# Altium PCB RevA.PcbDoc (part 2 of 2)
Units mm, origin at the board's own origin, x right, y up, seen from the top; angles counter-clockwise.
Board outline 119.55 x 74.88 mm, 2 copper layers (Top Layer, Bottom Layer); 154 components, 82 nets, 576 pads, 146 vias.
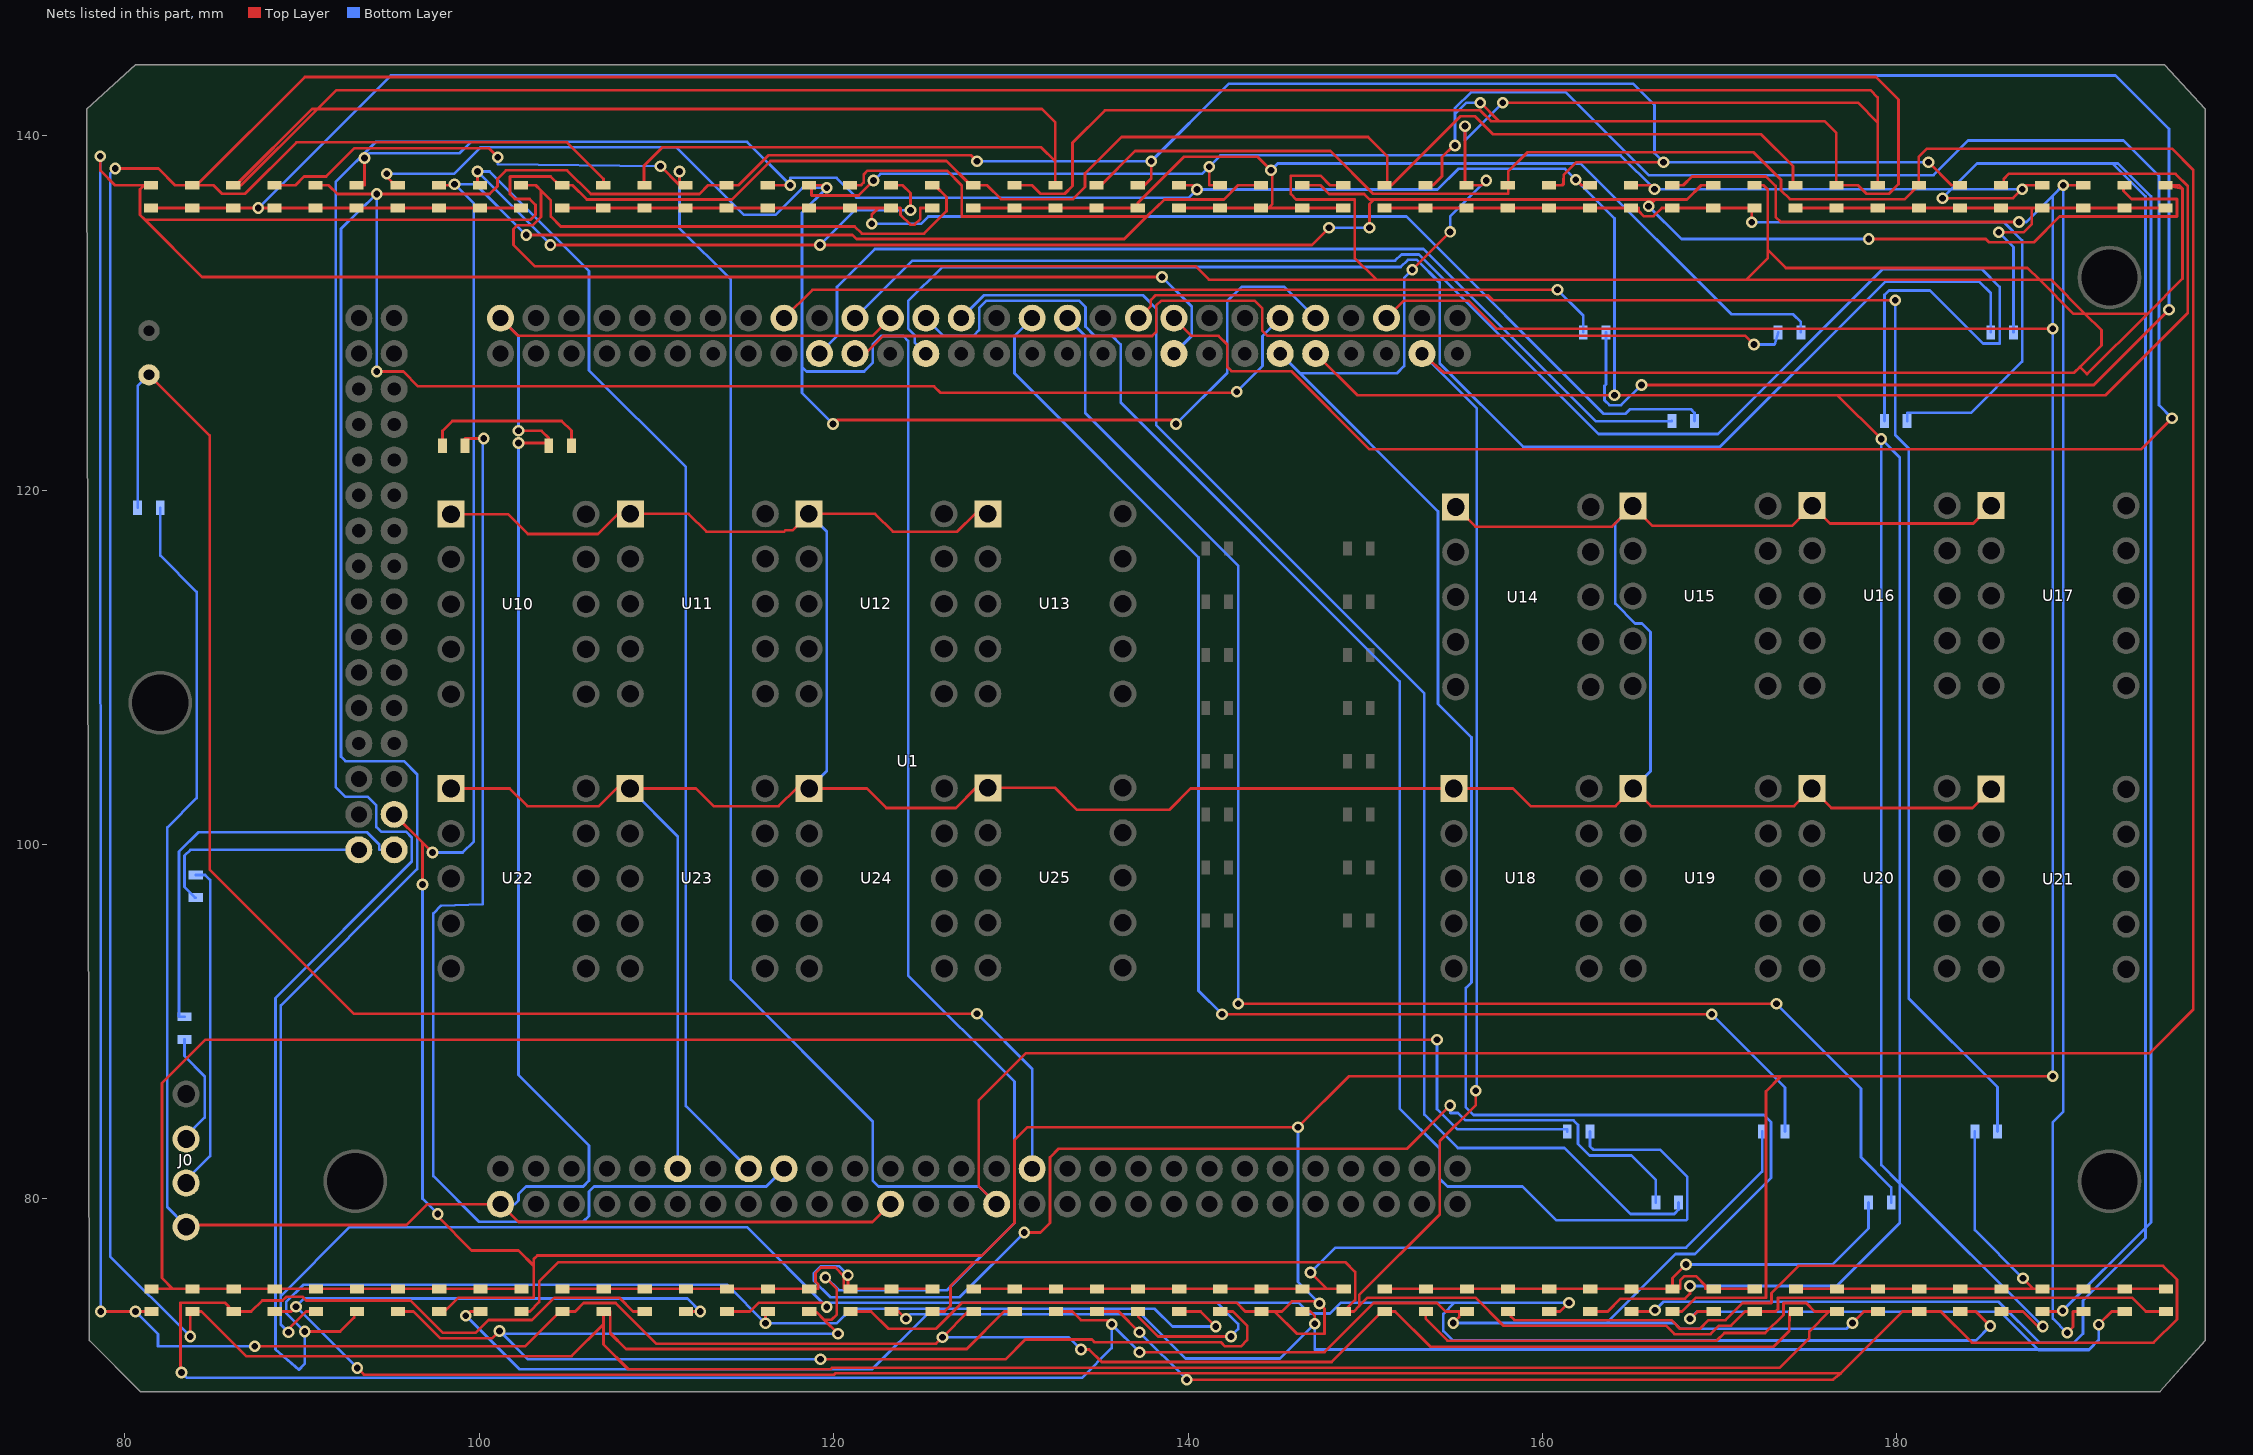
[diagram p2: the nets of this part, all layers, seen from the top]

## Via types
v1: diameter 0.66, hole 0.381, Top Layer to Bottom Layer, 146 vias

## Nets (pads, with @x,y where several pads share a name; then routed paths per layer and width w, separated by ;. In a path a pad name is that pad's centre, name@x,y a point inside that pad or via, vN(x,y) a via of type N, cw(c..) or ccw(c..) an arc to the next point about the centre after c; other vN are vias at no path point) (continued)
C_g/IO_VB6N1_171: U1.171 U10.1 U11.1 U12.1 U13.1 U14.1 U15.1 U16.1 U17.1 U18.1 U19.1 U20.1 U21.1 U22.1 U23.1 U24.1 U25.1 | length 215.6
  Top Layer w0.152: U22.1@98.4,103.16 101.716,103.16 102.718,102.159 106.746,102.159 107.747,103.16 U23.1@108.5,103.16 112.223,103.16 113.224,102.159 116.891,102.159 117.892,103.16 U24.1@118.62,103.16 121.869,103.16 122.972,102.057 126.898,102.057 128.041,103.2 U25.1@128.7,103.2 132.486,103.2 133.732,101.955 138.937,101.955 140.142,103.16 U18.1@155,103.16 158.333,103.16 159.334,102.159 164.119,102.159 U19.1@165.12,103.16 166.121,102.159 174.199,102.159 U20.1@175.2,103.16 176.303,102.057 184.257,102.057 U21.1@185.32,103.12 ; U10.1@98.4,118.64 101.629,118.64 102.743,117.526 106.689,117.526 107.823,118.66 U11.1@108.52,118.66 111.811,118.66 112.818,117.653 117.197,117.653 117.273,117.728 117.668,117.728 U12.1@118.6,118.66 122.331,118.66 123.338,117.653 126.975,117.653 127.982,118.66 U13.1@128.7,118.66 ; U14.1@155.1,119.04 156.208,117.932 163.932,117.932 U15.1@165.1,119.1 166.217,117.983 174.083,117.983 U16.1@175.22,119.12 176.23,118.11 184.31,118.11 U17.1@185.32,119.12
  Bottom Layer w0.152: U23.1@108.5,103.16 111.2,100.46 U1.171@111.2,81.7 ; U12.1@118.6,118.66 119.609,117.651 119.609,104.149 U24.1@118.62,103.16 ; U15.1@165.1,119.1 164.109,118.109 164.109,113.589 165.227,112.471 165.608,112.471 166.09,111.989 166.09,104.13 U19.1@165.12,103.16
D0: D10.1 D11.1 D12.1 D13.1 D14.1 D15.1 D16.1 D17.1 D18.1 D19.1 R30.2 | length 181.3
  Top Layer w0.152: D10.1@81.48,135.92 D11.1@83.8,135.92 D12.1@86.12,135.92 v1(87.528,135.92) D13.1@88.44,135.92 D14.1@90.76,135.92 D15.1@93.08,135.92 D16.1@95.4,135.92 D17.1@97.72,135.92 D18.1@100.04,135.92 D19.1@102.36,135.92 ; v1(165.583,125.933) 191.11,125.933 v1(195.351,130.175)
  Bottom Layer w0.152: v1(87.528,135.92) 95.008,143.4 192.337,143.4 195.351,140.386 v1(195.351,130.175) ; R30.2@163.58,128.9 163.58,125.959 163.5,125.878 163.5,125.07 163.779,124.79 164.44,124.79 v1(165.583,125.933)
D0/IO_VB2N0_37: R30.1 U1.22 | length 47.3
  Top Layer w0.152: U1.22@117.2,129.7 118.799,131.299 v1(160.846,131.299)
  Bottom Layer w0.152: v1(160.846,131.299) 162.3,129.845 R30.1@162.3,128.9
D1: D20.1 D21.1 D22.1 D23.1 D24.1 D25.1 D26.1 D27.1 D28.1 D29.1 R31.2 | length 75.2
  Top Layer w0.152: D20.1@104.68,135.92 D21.1@107,135.92 D22.1@109.32,135.92 D23.1@111.64,135.92 D24.1@113.96,135.92 D25.1@116.28,135.92 D26.1@118.6,135.92 D27.1@120.92,135.92 122.53,135.92 ; v1(122.149,135.026) 122.149,135.539 122.53,135.92 ; D29.1@125.56,135.92 124.891,135.92 124.891,135.306 124.562,134.976 124.333,134.976 123.775,135.534 123.775,135.92 D28.1@123.24,135.92 122.53,135.92
  Bottom Layer w0.152: v1(122.149,135.026) 124.933,135.026 125.339,135.433 152.324,135.433 163.449,124.308 164.694,124.308 164.948,124.562 168.377,124.562 168.58,124.358 R31.2@168.58,123.9
D1/IO_VB2N0_38: R31.1 U1.37 | length 56.2
  Bottom Layer w0.152: U1.37@119.2,127.7 120.193,128.693 120.193,131.47 122.325,133.603 153.29,133.603 163.017,123.876 167.3,123.876 R31.1@167.3,123.9
D1_OUT: D1.2 R50.1 | length 9.4
  Top Layer w0.152: D1.2@97.92,122.5 97.92,123.342 98.479,123.901 104.648,123.901 105.2,123.349 R50.1@105.2,122.5
D2: D30.1 D31.1 D32.1 D33.1 D34.1 D35.1 D36.1 D37.1 D38.1 D39.1 R32.2 | length 64.4
  Top Layer w0.152: D30.1@127.88,135.92 D31.1@130.2,135.92 D32.1@132.52,135.92 D33.1@134.84,135.92 D34.1@137.16,135.92 137.16,136.195 139.776,138.81 143.917,138.81 v1(144.678,138.049) 144.755,137.973 144.755,136.144 144.531,135.92 ; D35.1@139.48,135.92 D36.1@141.8,135.92 D37.1@144.12,135.92 144.531,135.92 ; D39.1@148.76,135.92 D38.1@146.44,135.92 144.531,135.92
  Bottom Layer w0.152: v1(144.678,138.049) 145.059,138.429 162.154,138.429 170.663,129.921 174.142,129.921 174.58,129.483 R32.2@174.58,128.9
D2/IO_VB2N0_41: R32.1 U1.39 | length 56.5
  Top Layer w0.152: U1.39@121.2,127.7 121.8,127.7 122.79,128.69 137.973,128.69 138.201,128.919 138.201,130.404 138.488,130.69 143.751,130.69 144.19,130.251 144.19,128.987 144.475,128.702 171.45,128.702 v1(171.933,128.219)
  Bottom Layer w0.152: v1(171.933,128.219) 173.097,128.219 R32.1@173.3,128.9
D3: D40.1 D41.1 D42.1 D43.1 D44.1 D45.1 D46.1 D47.1 D48.1 D49.1 R33.2 | length 52.8
  Top Layer w0.152: D40.1@151.08,135.92 D41.1@153.4,135.92 D42.1@155.72,135.92 D43.1@158.04,135.92 D44.1@160.36,135.92 D45.1@162.68,135.92 D46.1@165,135.92 165.431,135.92 165.431,135.738 165.71,135.459 166.273,135.459 166.734,135.92 D47.1@167.32,135.92 D48.1@169.64,135.92 D49.1@171.806,135.92 ; v1(171.806,135.112) D49.1@171.806,135.92 ; D49.1@171.96,135.92 D49.1@171.806,135.92
  Bottom Layer w0.152: v1(171.806,135.112) 186.046,135.112 187.071,134.087 187.071,127.254 184.175,124.358 180.58,124.358 R33.2@180.58,123.9
D3/IO_VB2N0_43: R33.1 U1.41 | length 92.7
  Bottom Layer w0.152: U1.41@121.2,129.7 124.444,132.944 151.689,132.944 152.043,133.298 153.034,133.298 163.168,123.165 169.901,123.165 179.197,132.461 184.81,132.461 185.801,131.47 185.801,128.27 184.861,128.27 181.864,131.267 179.553,131.267 179.3,131.014 R33.1@179.3,123.9
D4: D50.1 D51.1 D52.1 D53.1 D54.1 D55.1 D56.1 D57.1 D58.1 D59.1 R34.2 | length 29.8
  Top Layer w0.152: D50.1@174.28,135.92 D51.1@176.6,135.92 D52.1@178.92,135.92 D53.1@181.24,135.92 182.054,135.92 182.058,135.916 183.129,135.916 183.133,135.92 D54.1@183.56,135.92 D55.1@185.88,135.92 187.613,135.92 ; v1(185.75,134.544) 187.147,134.544 187.613,135.009 187.613,135.92 ; D59.1@195.16,135.92 D58.1@192.84,135.92 D57.1@190.52,135.92 D56.1@188.2,135.92 187.613,135.92
  Bottom Layer w0.152: v1(185.75,134.544) 186.58,133.714 R34.2@186.58,128.9
D4/IO_VB2N1_44: R34.1 U1.43 | length 78.8
  Bottom Layer w0.152: U1.43@125.2,127.7 124.573,128.327 124.573,128.742 124.206,129.109 124.206,130.658 126.136,132.587 151.994,132.587 152.4,132.994 152.908,132.994 154.203,131.698 154.203,127.142 158.917,122.428 170.003,122.428 179.347,131.772 184.636,131.772 185.3,131.108 R34.1@185.3,128.9
D5: D60.1 D61.1 D62.1 D63.1 D64.1 D65.1 D66.1 D67.1 D68.1 D69.1 R40.2 | length 117.6
  Top Layer w0.152: D60.1@81.5,74.92 82.702,74.92 ; D69.1@102.38,74.92 D68.1@100.06,74.92 D67.1@97.74,74.92 D66.1@95.42,74.92 D65.1@93.1,74.92 D64.1@90.78,74.92 D63.1@88.46,74.92 D62.1@86.14,74.92 D61.1@83.82,74.92 82.702,74.92 ; v1(154.051,88.976) 84.531,88.976 82.093,86.538 82.093,75.53 82.702,74.92
  Bottom Layer w0.152: v1(154.051,88.976) 154.051,85.065 155.194,83.922 161.4,83.922 R40.2@161.4,83.8
D5/IO_VB2N1_45: R40.1 U1.44 | length 93.6
  Bottom Layer w0.152: U1.44@125.2,129.7 126.198,128.702 127.88,128.702 128.21,129.032 128.21,130.274 128.626,130.69 133.851,130.69 134.21,130.331 134.21,129.222 134.722,128.71 135.704,128.71 136.195,128.219 136.195,124.956 151.943,109.208 151.943,85.099 154.203,82.838 154.203,81.128 154.635,80.696 158.877,80.696 160.782,78.791 168.097,78.791 168.173,78.867 168.173,81.229 166.625,82.778 162.865,82.778 162.68,82.963 R40.1@162.68,83.8
D6: D70.1 D71.1 D72.1 D73.1 D74.1 D75.1 D76.1 D77.1 D78.1 D79.1 R41.2 | length 85
  Top Layer w0.152: D70.1@104.7,74.92 D71.1@107.02,74.92 D72.1@109.34,74.92 D73.1@111.66,74.92 D74.1@113.98,74.92 D75.1@116.3,74.92 D76.1@118.62,74.92 119.134,74.92 119.134,75.167 118.974,75.326 118.974,75.819 119.278,76.123 120.091,76.123 120.563,75.652 120.563,74.92 D77.1@120.802,74.92 ; v1(120.802,75.692) D77.1@120.802,74.92 ; D79.1@125.58,74.92 D78.1@123.26,74.92 D77.1@120.94,74.92 D77.1@120.802,74.92 ; v1(130.759,78.105) 131.674,78.105 132.207,78.638 132.207,82.347 132.69,82.829 152.349,82.829 v1(154.788,85.268)
  Bottom Layer w0.152: v1(120.802,75.692) 120.294,76.2 119.278,76.2 118.872,75.794 118.872,75.387 119.812,74.447 127.102,74.447 v1(130.759,78.105) ; v1(154.788,85.268) 154.788,84.861 154.806,84.843 155.236,84.843 155.651,84.428 161.747,84.428 162.001,84.174 162.001,83.109 162.662,82.448 165.028,82.448 166.4,81.077 R41.2@166.4,79.8
D6/IO_VB2N2_49: R41.1 U1.46 | length 80.8
  Bottom Layer w0.152: U1.46@127.2,129.7 128.495,130.995 137.458,130.995 138.201,130.251 138.201,123.66 153.33,108.532 153.33,84.76 155.222,82.867 161.241,82.867 164.962,79.146 167.437,79.146 167.68,79.39 R41.1@167.68,79.8
D7: D80.1 D81.1 D82.1 D83.1 D84.1 D85.1 D86.1 D87.1 D88.1 D89.1 R42.2 | length 52.3
  Top Layer w0.152: D80.1@127.9,74.92 D81.1@130.22,74.92 D82.1@132.54,74.92 D83.1@134.86,74.92 D84.1@137.18,74.92 D85.1@139.5,74.92 D86.1@141.82,74.92 D87.1@144.14,74.92 D88.1@146.46,74.92 147.838,74.92 ; v1(146.914,75.844) 147.838,74.92 ; D89.1@148.78,74.92 147.838,74.92
  Bottom Layer w0.152: v1(146.914,75.844) 148.317,77.248 168.104,77.248 172.4,81.544 R42.2@172.4,83.8
D7/IO_VB2N3_55: R42.1 U1.52 | length 80.5
  Top Layer w0.152: v1(141.91,90.424) v1(169.545,90.424)
  Bottom Layer w0.152: U1.52@131.2,129.7 130.2,128.7 130.2,126.594 140.589,116.205 140.589,91.745 v1(141.91,90.424) ; v1(169.545,90.424) 173.68,86.289 R42.1@173.68,83.8
D8: D90.1 D91.1 D92.1 D93.1 D94.1 D95.1 D96.1 D97.1 D98.1 D99.1 R43.2 | length 36.2
  Top Layer w0.152: D90.1@151.1,74.92 D91.1@153.42,74.92 D92.1@155.74,74.92 D93.1@158.06,74.92 D94.1@160.38,74.92 D95.1@162.7,74.92 D96.1@165.02,74.92 D97.1@167.335,74.92 ; v1(168.097,76.302) 167.335,75.54 D97.1@167.335,74.92 ; D99.1@171.98,74.92 D98.1@169.66,74.92 169.198,74.92 169.198,75.098 168.656,75.641 168.021,75.641 167.768,75.387 167.768,74.92 D97.1@167.34,74.92 D97.1@167.335,74.92
  Bottom Layer w0.152: v1(168.097,76.302) 176.368,76.302 178.4,78.334 R43.2@178.4,79.8
D8/IO_VB2N3_57: R43.1 U1.56 | length 86.9
  Top Layer w0.152: v1(142.824,91.008) v1(173.203,91.008)
  Bottom Layer w0.152: U1.56@133.2,129.7 134.198,128.702 134.198,124.358 142.824,115.732 v1(142.824,91.008) ; v1(173.203,91.008) 177.978,86.233 177.978,82.347 179.68,80.645 R43.1@179.68,79.8
D9: D100.1 D101.1 D102.1 D103.1 D104.1 D105.1 D106.1 D107.1 D108.1 D109.1 R44.2 | length 31.1
  Top Layer w0.152: D100.1@174.3,74.92 D101.1@176.62,74.92 D102.1@178.94,74.92 D103.1@181.26,74.92 D104.1@183.58,74.92 D105.1@185.9,74.92 187.716,74.92 ; v1(187.122,75.514) 187.716,74.92 ; D109.1@195.18,74.92 D108.1@192.86,74.92 D107.1@190.54,74.92 D106.1@188.22,74.92 187.716,74.92
  Bottom Layer w0.152: R44.2@184.4,83.8 184.4,78.236 v1(187.122,75.514)
D9/IO_VB3N3_68: R44.1 U1.65 | length 92.9
  Top Layer w0.152: U1.65@137.2,129.7 137.896,130.396 137.896,130.731 138.159,130.995 156.937,130.995 157.223,130.708 v1(179.908,130.708)
  Bottom Layer w0.152: v1(179.908,130.708) 179.908,123.114 180.67,122.352 180.67,91.319 185.68,86.309 R44.1@185.68,83.8
G0/IO_VB3N2_69: D10.2 D20.2 D30.2 D40.2 D50.2 D60.2 D70.2 D80.2 D90.2 D100.2 U1.68 | length 350.1
  Top Layer w0.152: v1(78.613,138.836) 78.613,138.038 79.451,137.2 81.077,137.2 ; v1(78.638,73.64) v1(80.6,73.64) D60.2@81.5,73.64 ; D10.2@81.48,137.2 81.077,137.2 ; v1(87.325,71.679) 102.585,71.679 104.546,73.64 D70.2@104.7,73.64 105.414,73.64 105.893,74.118 107.696,74.118 109.982,71.832 125.781,71.832 v1(126.136,72.187) 127.59,73.64 D80.2@127.9,73.64 ; v1(133.96,71.501) 134.417,71.501 135.128,70.79 148.103,70.79 150.952,73.64 D90.2@151.1,73.64 151.689,73.64 153.674,71.655 173.039,71.655 173.927,72.542 173.945,73.64 D100.2@174.3,73.64 ; v1(138.532,132.029) 84.353,132.029 81.129,135.254 ; D40.2@151.08,137.2 D40.2@151.232,137.2 ; D50.2@174.28,137.2 174.142,137.2 174.142,138.278 172.339,140.081 157.199,140.081 156.184,141.096 155.382,141.096 151.486,137.2 D40.2@151.232,137.2 ; 81.077,137.2 80.848,136.971 80.848,135.534 81.129,135.254 ; 81.129,135.254 102.894,135.254 103.175,135.534 103.175,136.093 102.845,136.423 102.006,136.423 101.732,136.698 101.732,137.693 104.028,137.693 104.521,137.2 D20.2@104.68,137.2 105.269,137.2 106.07,136.398 114.249,136.398 116.422,138.571 126.366,138.571 127.737,137.2 D30.2@127.88,137.2 128.656,137.2 129.438,136.417 133.502,136.417 134.188,137.103 134.188,137.871 136.246,139.929 150.165,139.929 151.232,138.862 D40.2@151.232,137.2
  Bottom Layer w0.152: v1(78.613,138.836) 78.638,76.987 v1(78.638,73.64) ; v1(80.6,73.64) 81.87,72.37 81.87,71.679 v1(87.325,71.679) ; v1(126.136,72.187) 133.274,72.187 v1(133.96,71.501) ; v1(138.532,132.029) 140.208,130.353 140.208,128.708 U1.68@139.2,127.7
G1/IO_VB3N2_70: D11.2 D21.2 D31.2 D41.2 D51.2 D61.2 D71.2 D81.2 D91.2 D101.2 U1.69 | length 537.7
  Top Layer w0.152: v1(79.451,138.151) 81.89,138.151 82.84,137.2 D11.2@83.8,137.2 D11.2@84.049,137.2 ; v1(83.693,72.238) 83.693,73.64 D61.2@83.82,73.64 84.328,73.64 86.847,71.121 105.207,71.121 107.01,72.923 ; D21.2@107,137.2 107.01,137.2 107.01,137.566 104.954,139.622 89.686,139.622 86.785,136.722 85.492,136.722 85.013,137.2 D11.2@84.049,137.2 ; D31.2@130.2,137.2 131.195,137.2 131.674,136.722 133.039,136.722 133.477,137.16 133.477,139.598 135.305,141.426 156.488,141.426 157.097,140.818 157.531,140.818 ; D81.2@130.22,73.64 129.622,73.64 127.509,71.527 108.279,71.527 107.391,72.415 107.391,73.64 D71.2@107.02,73.64 107.01,73.64 107.01,72.923 ; U1.69@139.2,129.7 140.198,128.702 141.727,128.702 142.21,128.219 142.21,126.943 142.443,126.71 145.821,126.71 150.23,122.301 193.777,122.301 v1(195.529,124.054) ; D41.2@153.4,137.2 153.822,137.2 154.33,137.708 154.33,138.786 154.991,139.446 v1(155.067,139.446) ; D91.2@153.42,73.64 153.416,73.64 153.416,73.228 154.645,71.999 169.834,71.999 170.26,72.426 172.566,72.426 173.596,73.456 173.596,74.118 174.883,74.118 175.362,73.64 176.174,73.64 ; v1(156.489,141.859) 157.531,140.818 ; D101.2@176.62,73.64 176.174,73.64 ; D11.2@84.049,137.2 90.155,143.307 178.816,143.307 180.086,142.037 180.086,137.262 179.546,136.722 178.283,136.722 177.804,137.2 D51.2@176.6,137.2 176.581,137.2 176.581,140.157 175.92,140.818 157.531,140.818 ; 107.01,72.923 107.01,71.78 108.407,70.384 119.811,70.384 119.893,70.466 173.387,70.466 175.057,72.136 175.057,72.522 176.174,73.64
  Bottom Layer w0.152: v1(79.451,138.151) 79.172,137.871 79.172,76.759 v1(83.693,72.238) ; v1(155.067,139.446) 155.067,141.224 ; v1(156.489,141.859) 155.702,141.859 155.067,141.224 ; v1(195.529,124.054) 194.793,124.79 194.793,137.719 192.786,139.725 184.023,139.725 182.067,137.77 165.989,137.77 161.29,142.469 155.981,142.469 155.067,141.554 155.067,141.224
G2/IO_VB3N1_78: D12.2 D22.2 D32.2 D42.2 D52.2 D62.2 D72.2 D82.2 D92.2 D102.2 U1.76 | length 444.4
  Top Layer w0.152: v1(83.2,70.2) 83.135,70.265 83.135,74.142 85.637,74.143 D62.2@86.14,73.64 87.127,73.64 87.757,74.27 88.903,74.27 89.109,74.476 90.019,74.476 90.225,74.27 96.114,74.27 97.942,72.441 99.796,72.441 100.516,73.162 102.981,73.162 104.242,74.423 107.898,74.423 108.681,73.64 D72.2@109.34,73.64 ; D12.2@86.12,137.2 D12.2@86.258,137.2 ; D22.2@109.32,137.2 109.296,137.2 109.296,138.303 110.338,139.344 131.699,139.344 132.512,138.532 ; D32.2@132.52,137.2 132.512,137.2 132.512,138.532 ; D82.2@132.54,73.64 133.472,73.64 133.96,73.152 135.458,73.152 v1(135.687,72.923) ; v1(137.262,71.349) 147.7,71.349 150.47,74.118 154.051,74.118 154.529,73.64 155.296,73.64 ; v1(152.654,132.436) v1(154.788,134.569) ; v1(154.965,73) 155.296,73.33 155.296,73.64 ; v1(155.626,140.538) 155.626,137.2 D42.2@155.72,137.2 156.555,137.2 v1(156.82,137.465) ; D92.2@155.74,73.64 155.296,73.64 ; v1(157.759,141.859) 177.8,141.859 178.918,140.741 ; v1(177.495,73) 178.136,73.64 D102.2@178.94,73.64 ; D52.2@178.92,137.2 178.918,137.2 178.918,140.741 ; D12.2@86.258,137.2 86.563,137.2 90.867,141.503 ; D12.2@86.258,137.2 90.562,141.503 90.867,141.503 ; 90.867,141.503 131.75,141.503 132.512,140.741 132.512,138.532 ; 90.867,141.503 91.933,142.57 178.512,142.57 178.918,142.164 178.918,140.741
  Bottom Layer w0.152: v1(83.2,70.2) 83.499,69.901 134.011,69.901 135.687,71.577 v1(135.687,72.923) v1(137.262,71.349) ; U1.76@145.2,127.7 146.306,126.594 ; v1(152.654,132.436) 152.197,131.978 152.197,127 151.79,126.594 146.306,126.594 ; v1(154.788,134.569) 154.788,135.433 v1(156.82,137.465) ; v1(154.965,73) 163.608,73 ; v1(155.626,140.538) 155.626,139.725 v1(157.759,141.859) ; v1(177.495,73) 177.166,72.67 167.768,72.67 167.438,73 163.608,73 ; 146.306,126.594 154.102,118.798 154.102,107.933 155.99,106.045 155.99,92.211 155.677,91.897 155.677,85.166 156.108,84.734 172.491,84.734 172.898,84.328 172.898,81.178 168.612,76.893 167.501,76.893 163.608,73
G3/IO_VB3N1_80: D63.2 D73.2 D83.2 D93.2 D103.2 | length 222.3
  Top Layer w0.152: D63.2@88.46,73.64 89.388,73.64 v1(89.662,73.914) ; v1(93.116,70.46) 93.496,70.08 120.034,70.08 120.116,70.162 176.836,70.162 ; D73.2@111.66,73.64 v1(112.471,73.64) ; D83.2@134.86,73.64 136.088,73.64 v1(137.262,72.466) ; v1(139.929,69.799) 176.398,69.799 176.836,70.162 ; D93.2@158.06,73.64 158.217,73.64 158.217,73.355 158.42,73.152 167.284,73.152 167.766,72.67 168.885,72.67 169.367,73.152 170.331,73.152 171.298,74.118 172.921,74.118 172.921,74.686 174.452,76.217 195.029,76.217 195.809,75.438 195.809,73.203 194.488,71.882 184.232,71.882 182.474,73.64 D103.2@181.26,73.64 180.315,73.64 176.836,70.162
  Bottom Layer w0.152: v1(93.116,70.46) v1(89.662,73.914) 90.12,74.372 111.739,74.372 v1(112.471,73.64) ; v1(137.262,72.466) v1(139.929,69.799)
G3/IO_VB5N0_143: D13.2 D23.2 D33.2 D43.2 D53.2 U1.143 | length 288.7
  Top Layer w0.152: D13.2@88.44,137.2 89.626,137.2 90.119,137.693 91.362,137.693 92.961,139.293 100.534,139.293 v1(101.041,138.786) ; v1(110.226,138.277) D23.2@111.303,137.2 ; v1(111.303,137.973) D23.2@111.303,137.2 ; D23.2@111.64,137.2 D23.2@111.303,137.2 ; U1.143@129.2,79.7 128.194,80.706 128.194,85.573 130.835,88.214 194.259,88.214 196.723,90.678 196.723,138.074 195.529,139.268 181.712,139.268 181.229,138.786 D53.2@181.229,137.2 ; D33.2@134.84,137.2 135.079,137.2 137.016,139.137 148.029,139.137 150.444,136.722 158.064,136.722 D43.2@158.064,137.2 ; D43.2@158.04,137.2 D43.2@158.064,137.2 ; D53.2@181.24,137.2 D53.2@181.229,137.2 ; D43.2@158.064,137.2 158.064,137.973 159.156,139.064 171.908,139.064 173.462,137.511 173.462,136.912 173.956,136.417 180.446,136.417 D53.2@181.229,137.2
  Bottom Layer w0.152: v1(101.041,138.786) 101.041,138.379 v1(110.226,138.277) ; v1(111.303,137.973) 111.303,134.772 114.198,131.877 114.198,92.38 122.199,84.379 122.199,81.026 122.53,80.696 128.204,80.696 U1.143@129.2,79.7
G4/IO_VB3N1_81: D14.2 D24.2 D34.2 D44.2 D54.2 D64.2 D74.2 D84.2 D94.2 D104.2 U1.78 | length 377.9
  Top Layer w0.152: v1(89.23,72.466) 89.23,72.649 90.221,73.64 D64.2@90.78,73.64 ; D14.2@90.76,137.2 91.502,137.2 91.999,136.703 v1(94.209,136.703) 100.584,136.703 101.025,137.144 101.025,137.566 101.502,138.043 104.958,138.043 106.299,136.703 112.42,136.703 112.918,137.2 D24.2@113.96,137.2 114.621,137.2 116.308,138.887 127.762,138.887 v1(128.092,138.557) ; v1(94.209,126.69) 95.712,126.69 96.546,125.857 125.656,125.857 126.021,125.491 142.687,125.491 v1(142.748,125.552) ; D74.2@113.98,73.64 115.271,73.64 115.773,74.143 119.365,74.143 v1(119.609,73.899) ; D34.2@137.16,137.2 137.541,137.2 137.922,137.581 v1(137.922,138.557) ; D84.2@137.18,73.64 137.18,73.355 138.298,72.238 v1(142.418,72.238) ; D44.2@160.36,137.2 161.138,137.2 ; D94.2@160.38,73.64 160.991,73.64 v1(161.493,74.143) ; v1(166.827,138.506) 161.93,138.506 161.193,137.77 ; v1(181.788,138.506) 183.094,137.2 D54.2@183.56,137.2 ; D104.2@183.58,73.64 184.449,73.64 v1(185.268,72.822) ; 161.138,137.2 161.193,137.77 ; 161.138,137.2 161.193,137.255 161.193,137.77
  Bottom Layer w0.152: v1(89.23,72.466) 88.799,72.897 88.799,74.528 ; v1(94.209,126.69) v1(94.209,136.703) 92.202,134.747 92.202,104.953 92.456,104.699 95.758,104.699 96.495,103.962 96.495,98.603 88.799,90.908 88.799,74.528 ; v1(128.092,138.557) v1(137.922,138.557) 142.291,142.926 165.125,142.926 166.319,141.732 166.319,139.015 v1(166.827,138.506) v1(181.788,138.506) ; v1(142.418,72.238) 142.824,72.644 142.824,72.949 141.63,74.143 ; v1(142.748,125.552) 144.196,127 144.196,128.696 U1.78@145.2,129.7 ; v1(161.493,74.143) 155.042,74.143 ; v1(185.268,72.822) 184.455,72.009 154.94,72.009 154.407,72.542 154.407,73.508 155.042,74.143 ; 88.799,74.528 92.677,78.405 115.103,78.405 v1(119.609,73.899) ; v1(119.609,73.899) 119.852,74.143 ; v1(119.609,73.899) 119.609,74.143 119.852,74.143 ; 119.852,74.143 141.63,74.143 ; 141.63,74.143 146.232,74.143 146.847,73.528 148.002,73.528 148.617,74.143 155.042,74.143
G5/IO_VB3N1_82: D15.2 D25.2 D35.2 D45.2 D55.2 D65.2 D75.2 D85.2 D95.2 D105.2 U1.81 | length 460.6
  Top Layer w0.152: v1(90.145,72.517) 92.151,72.517 92.939,73.304 92.939,73.64 D65.2@93.1,73.64 ; D15.2@93.08,137.2 93.523,137.2 v1(93.523,138.735) ; v1(116.154,72.974) 116.154,73.64 D75.2@116.3,73.64 ; D25.2@116.28,137.2 v1(117.551,137.2) ; D35.2@139.48,137.2 140.259,137.2 v1(140.502,136.957) ; D85.2@139.5,73.64 140.711,73.64 v1(141.554,72.796) ; U1.81@147.2,127.7 149.551,125.349 ; v1(161.874,137.516) 161.889,137.516 162.204,137.2 D45.2@162.68,137.2 ; D95.2@162.7,73.64 163.683,73.64 164.414,74.371 168.049,74.371 168.326,74.647 v1(168.326,75.082) ; v1(179.121,122.885) 176.66,125.346 ; D55.2@185.88,137.2 186.03,137.2 186.03,137.566 186.309,137.846 195.717,137.846 196.417,137.146 196.417,130.005 191.759,125.346 176.66,125.346 ; D105.2@185.9,73.64 187.114,73.64 187.957,72.796 v1(188.239,72.796) ; 149.551,125.349 164.059,125.348 176.66,125.346 ; 149.551,125.349 v1(164.059,125.349) 176.657,125.349 176.66,125.346
  Bottom Layer w0.152: v1(93.523,138.735) 93.802,139.014 98.897,139.014 99.532,139.648 ; v1(141.554,72.796) 139.116,72.796 138.112,73.8 120.993,73.8 120.167,72.974 v1(116.154,72.974) 113.97,75.159 90.094,75.159 89.104,74.169 89.104,73.558 v1(90.145,72.517) 90.145,70.688 89.814,70.358 88.495,71.5 88.495,91.34 96.19,99.035 96.19,100.405 95.885,100.71 94.471,100.71 94.19,100.99 94.19,102.21 93.71,102.69 92.456,102.69 91.897,103.249 91.897,137.389 94.157,139.648 99.532,139.648 ; v1(164.059,125.349) 164.059,135.331 v1(161.874,137.516) 161.265,138.125 155.245,138.125 154.077,136.957 v1(140.502,136.957) 140.045,136.5 121.285,136.5 120.167,137.617 117.551,137.617 v1(117.551,137.2) 115.103,139.648 99.532,139.648 ; v1(168.326,75.082) 176.606,75.082 180.162,78.638 180.162,80.874 ; v1(188.239,72.796) 180.162,80.874 ; 180.162,80.874 180.162,121.844 v1(179.121,122.885) 179.121,81.915 180.162,80.874
G6/IO_VB3N1_83: D16.2 D26.2 D36.2 D46.2 D56.2 D66.2 D76.2 D86.2 D96.2 D106.2 U1.82 | length 489.7
  Top Layer w0.152: v1(94.782,137.846) 94.782,137.668 95.25,137.2 D16.2@95.4,137.2 ; D66.2@95.42,73.64 96.291,73.64 97.794,72.137 100.736,72.137 v1(101.142,72.543) v1@101.295,72.39 ; D26.2@118.6,137.2 D26.2@118.745,137.2 ; D76.2@118.62,73.64 118.62,73.584 119.05,73.584 119.456,73.178 ; v1(119.253,70.942) 129.692,70.942 130.81,72.06 134.569,72.06 134.722,71.907 141.859,71.907 142.087,71.679 142.977,71.679 143.332,72.035 143.332,72.847 142.539,73.64 D86.2@141.82,73.64 ; v1(119.532,75.565) 120.167,74.931 120.167,73.457 119.888,73.178 119.456,73.178 ; v1(119.609,137.058) 119.467,137.2 D26.2@118.745,137.2 ; v1(119.962,123.723) 120.19,123.951 139.091,123.951 v1(139.319,123.723) ; v1(120.244,72.39) 119.456,73.178 ; v1(122.25,137.465) 121.412,136.627 118.745,136.627 D26.2@118.745,137.2 ; v1(141.199,138.252) 141.199,137.2 D36.2@141.8,137.2 ; D46.2@165,137.2 166.101,137.2 v1(166.319,136.982) ; D96.2@165.02,73.64 166.274,73.64 v1(166.345,73.711) ; v1(182.575,136.474) 186.563,136.474 v1(187.071,136.982) 187.289,137.2 D56.2@188.2,137.2 ; D106.2@188.22,73.64 189.312,73.64 v1(189.357,73.685)
  Bottom Layer w0.152: v1(94.782,137.846) 98.565,137.846 100.063,139.344 111.126,139.344 114.935,135.534 116.713,135.534 118.237,137.058 v1(119.609,137.058) 118.21,135.66 118.21,126.951 ; v1(101.142,72.543) v1@101.295,72.39 ; v1(119.253,70.942) 102.743,70.942 v1@101.295,72.39 ; v1(119.532,75.565) 119.575,75.565 120.294,74.845 126.407,74.845 130.2,78.638 130.2,86.614 124.206,92.608 124.206,128.422 123.938,128.69 122.67,128.69 122.199,128.219 122.199,127.178 121.717,126.695 118.466,126.695 118.21,126.951 ; v1(119.962,123.723) 118.21,125.476 118.21,126.951 ; v1(120.244,72.39) v1@101.295,72.39 ; v1(122.25,137.465) 122.631,137.846 140.792,137.846 v1(141.199,138.252) 141.834,138.887 164.414,138.887 v1(166.319,136.982) 183.083,136.982 ; v1(139.319,123.723) 142.21,126.614 142.21,130.658 143.023,131.47 145.43,131.47 U1.82@147.2,129.7 ; v1(166.345,73.711) 166.827,74.193 185.725,74.193 188.036,71.882 189.992,71.882 190.5,72.39 190.5,74.27 194.031,77.8 194.031,78.359 ; v1(182.575,136.474) 183.083,136.982 ; v1(187.071,136.982) 183.083,136.982 ; v1(189.357,73.685) 194.031,78.359 ; 183.083,136.982 184.53,138.429 ; 184.53,138.429 192.177,138.429 ; 184.531,138.43 192.176,138.43 ; 192.177,138.429 194.031,136.576 194.031,78.359 ; 192.177,138.429 192.482,138.429 194.335,136.576 194.335,78.664 194.031,78.359
G7/IO_VB3N0_87: D17.2 D27.2 D37.2 D47.2 D57.2 D67.2 D77.2 D87.2 D97.2 D107.2 U1.86 | length 485.6
  Top Layer w0.152: U1.86@95.2,101.7 96.799,100.101 ; v1(96.799,97.739) 96.799,100.101 ; v1(97.357,99.543) 96.799,100.101 ; v1(97.663,79.146) 97.663,78.994 99.568,77.089 102.21,77.089 103.073,76.225 ; D17.2@97.72,137.2 98.541,137.2 v1(98.603,137.262) ; D67.2@97.74,73.64 98.044,73.64 98.826,74.422 103.073,74.422 103.073,76.225 ; v1(102.644,134.391) 121.058,134.391 121.286,134.164 136.399,134.164 137.668,135.433 ; D27.2@120.92,137.2 121.539,137.2 121.692,137.353 121.692,137.795 121.92,138.023 126.391,138.023 127.229,137.185 127.229,135.433 137.668,135.433 ; D77.2@120.94,73.64 122.118,73.64 123.088,72.67 125.781,72.67 127.254,74.143 142.723,74.143 143.225,73.64 D87.2@144.14,73.64 144.882,73.64 ; D37.2@144.12,137.2 142.824,137.2 142.023,136.399 138.659,136.399 ; U1.86@151.2,129.7 152.19,130.69 155.822,130.69 157.404,129.108 v1(188.798,129.108) ; D47.2@167.32,137.2 167.945,137.2 168.438,137.693 172.618,137.693 173.157,137.155 173.157,135.422 173.451,135.128 v1(186.893,135.128) ; D97.2@167.34,73.64 167.873,73.64 168.656,74.423 172.608,74.423 172.608,86.07 173.457,86.919 ; v1(188.798,86.919) 173.457,86.919 ; v1(189.382,137.2) D57.2@190.52,137.2 ; v1(189.611,72.441) 189.941,72.771 189.941,73.64 D107.2@190.54,73.64 ; 103.073,76.225 103.073,76.606 103.276,76.81 128.372,76.81 130.2,78.638 130.2,83.312 130.937,84.049 v1(146.202,84.049) 149.073,86.919 173.457,86.919 ; 137.668,135.433 137.693,135.433 138.659,136.399 ; 137.668,135.433 138.659,136.399 ; 144.882,73.64 145.288,73.64 145.867,74.219 147.295,74.219 v1(147.422,74.092) 147.701,73.812 147.701,72.39 146.132,72.39 144.882,73.64
  Bottom Layer w0.152: v1(96.799,97.739) 96.799,80.01 v1(97.663,79.146) ; v1(97.357,99.543) 99.06,99.543 99.695,100.177 99.695,136.17 v1(98.603,137.262) 99.774,137.262 v1(102.644,134.391) ; v1(146.202,84.049) 146.202,75.311 v1(147.422,74.092) ; v1(186.893,135.128) 187.31,135.128 188.798,136.616 ; v1(188.798,86.919) v1(188.798,129.108) 188.798,136.616 ; v1(189.611,72.441) 188.798,73.254 188.798,84.328 189.382,84.912 v1(189.382,137.2) 188.798,136.616
G8/IO_VB3N0_88: D68.2 D78.2 D88.2 D98.2 D108.2 | length 130.4
  Top Layer w0.152: v1(99.238,73.406) 99.472,73.64 D68.2@100.06,73.64 ; D78.2@123.26,73.64 123.667,73.64 v1(124.079,73.228) ; D88.2@146.46,73.64 146.914,73.64 147.142,73.411 v1(147.142,72.949) ; v1(168.326,73.228) 168.738,73.64 D98.2@169.66,73.64 ; v1(191.389,72.903) 192.126,73.64 D108.2@192.86,73.64
  Bottom Layer w0.152: v1(99.238,73.406) 102.26,70.384 122.175,70.384 125.287,73.496 ; v1(124.079,73.228) 124.347,73.496 125.287,73.496 ; v1(168.326,73.228) 168.732,73.635 185.826,73.635 187.96,71.501 ; v1(191.389,72.903) 191.389,72.034 190.856,71.501 ; 125.287,73.496 137.348,73.496 139.851,70.993 145.186,70.993 v1(147.142,72.949) 147.142,71.501 187.96,71.501 ; 187.96,71.501 188.011,71.45 190.805,71.45 190.856,71.501 ; 187.96,71.501 190.856,71.501
G8/IO_VB6N3_166: D18.2 D28.2 D38.2 D48.2 D58.2 U1.166 | length 186.5
  Top Layer w0.152: v1(99.898,137.973) 99.898,137.2 D18.2@100.04,137.2 ; v1(104.013,133.833) v1(119.228,133.833) 146.99,133.833 v1(147.955,134.798) ; D28.2@123.24,137.2 123.887,137.2 124.333,136.754 v1(124.333,135.788) ; D38.2@146.44,137.2 147.462,137.2 147.959,136.703 149.936,136.703 150.241,136.398 150.495,136.398 ; v1(150.241,134.798) 150.241,136.144 150.495,136.398 ; v1(165.989,136.017) 166.37,136.398 ; D48.2@169.64,137.2 168.961,137.2 168.159,136.398 166.37,136.398 ; v1(178.41,134.163) 185.015,134.163 185.193,133.986 187.74,133.986 189.187,135.433 195.809,135.433 195.809,136.423 193.243,136.423 192.786,136.881 192.786,137.2 D58.2@192.84,137.2 ; 150.495,136.398 166.37,136.398
  Bottom Layer w0.152: v1(104.013,133.833) 104.013,133.858 v1(99.898,137.973) 100.586,137.973 106.197,132.362 106.197,126.75 111.658,121.289 111.658,85.242 U1.166@115.2,81.7 ; v1(119.228,133.833) 121.183,135.788 v1(124.333,135.788) ; v1(147.955,134.798) v1(150.241,134.798) ; v1(165.989,136.017) 167.843,134.163 v1(178.41,134.163)
G9/IO_VB4N3_93: D19.2 D29.2 D39.2 D49.2 D59.2 D69.2 D79.2 D89.2 D99.2 D109.2 U1.87 | length 384.5
  Top Layer w0.152: D19.2@102.36,137.2 103.186,137.2 103.48,136.906 ; D69.2@102.38,73.64 102.85,73.64 103.378,74.168 103.378,75.336 104.469,76.428 127.939,76.428 ; D29.2@125.56,137.2 125.705,137.2 126.365,136.54 126.365,135.738 125.096,134.468 121.59,134.468 121.184,134.875 104.597,134.875 104.038,135.433 104.038,136.347 103.48,136.906 ; D79.2@125.58,73.64 126.263,73.64 126.594,73.97 126.594,75.082 127.939,76.428 ; D39.2@148.76,137.2 148.006,137.2 147.462,137.744 145.796,137.744 145.796,136.703 146.101,136.398 149.403,136.398 149.403,133.096 150.622,131.877 ; U1.87@153.2,127.7 154.433,126.619 189.992,126.619 190.322,126.949 ; v1(156.235,86.106) 156.235,85.293 154.203,83.261 154.203,79.121 149.657,74.574 149.657,73.945 ; D49.2@171.96,137.2 172.466,137.2 172.72,136.946 172.72,133.553 ; D109.2@195.18,73.64 194.051,73.64 193.268,74.423 173.292,74.423 173.292,73.773 173.159,73.64 D99.2@171.98,73.64 171.43,73.64 170.637,72.847 169.971,72.847 169.49,72.366 167.446,72.366 166.965,72.847 157.785,72.847 156.209,74.423 150.135,74.423 149.657,73.945 ; 103.48,136.906 103.48,135.409 103.021,134.95 102.159,134.95 101.931,134.722 101.931,133.833 103.125,132.639 140.411,132.639 141.173,131.877 150.622,131.877 ; 127.939,76.428 148.87,76.428 149.428,75.87 149.428,74.288 D89.2@148.78,73.64 149.352,73.64 149.657,73.945 ; 150.622,131.877 171.501,131.877 ; 171.501,131.877 188.036,131.877 ; 171.501,131.877 172.72,133.096 172.72,133.553 ; 172.72,133.553 173.736,132.537 187.376,132.537 188.036,131.877 ; 188.036,131.877 189.967,129.946 190.627,129.946 ; 188.036,131.877 188.697,131.877 190.627,129.946 ; 190.322,126.949 191.541,128.168 191.541,129.032 190.627,129.946 ; 190.322,126.949 190.729,126.543 194.132,129.946 ; 190.627,129.946 194.132,129.946 ; 194.132,129.946 196.113,131.927 196.113,137.007 ; 196.113,137.007 D59.2@195.16,137.2 195.92,137.2 196.113,137.007
  Bottom Layer w0.152: U1.87@153.2,127.7 156.295,124.605 156.295,86.165 v1(156.235,86.106)
GND: J0.4 R2.1 R50.2 U1.GND1 U1.GND2 U1.GND3 U1.GND4 | length 166.2
  Top Layer w0.152: J0.4@83.4,78.523 95.894,78.523 97.075,79.705 98.217,79.705 98.221,79.7 U1.GND4@101.2,79.7 102.211,78.689 122.189,78.689 U1.GND3@123.2,79.7 ; U1.GND1@101.2,129.7 102.198,128.702 122.202,128.702 U1.GND2@123.2,129.7 ; v1(102.21,122.657) R50.2@103.92,122.657 ; v1(102.21,123.342) 103.513,123.342 103.92,122.936 R50.2@103.92,122.657 ; R50.2@103.92,122.5 R50.2@103.92,122.657
  Bottom Layer w0.152: R2.1@82,119 82,116.307 84.049,114.258 84.049,102.616 82.398,100.965 82.398,79.526 J0.4@83.4,78.523 ; U1.GND4@101.2,79.7 102.006,79.7 102.21,79.903 102.21,80.264 102.642,80.696 105.867,80.696 106.197,81.026 106.197,83.007 102.21,86.995 v1(102.21,122.657) ; U1.GND1@101.2,129.7 102.21,128.69 v1(102.21,123.342)
IO_VB5N2_137/DAYLIGHT: R2.2 R3.2 U1.137 | length 93.8
  Top Layer w0.152: R3.2@81.36,126.5 84.785,123.075 84.785,98.577 92.913,90.449 v1(128.092,90.449)
  Bottom Layer w0.152: R2.2@80.72,119 80.72,125.86 R3.2@81.36,126.5 ; v1(128.092,90.449) 131.2,87.342 U1.137@131.2,81.7
IO_VB7N0_185/UART_TX: R101.1 U1.185 | length 12.6
  Bottom Layer w0.152: R101.1@84,97 83.959,97 83.363,97.597 83.363,99.365 83.698,99.7 U1.185@93.2,99.7
IO_VB7N1_186/UART_RX: R100.2 U1.186 | length 22.8
  Bottom Layer w0.152: R100.2@83.36,90.28 83.058,90.28 83.058,99.594 84.155,100.69 93.675,100.69 94.356,100.01 94.356,99.7 U1.186@95.2,99.7
UART_RX: J0.2 R100.1 | length 6.5
  Bottom Layer w0.152: R100.1@83.36,89 83.36,88.065 84.506,86.919 84.506,84.582 J0.2@83.4,83.476
UART_TX: J0.3 R101.2 | length 18.5
  Bottom Layer w0.152: J0.3@83.4,81 84.811,82.411 84.811,98.001 84.531,98.28 R101.2@84,98.28
WARN/IO_VB6N3_162: D1.1 U1.162 | length 68.5
  Top Layer w0.152: D1.1@99.2,122.5 99.2,122.911 v1(100.254,122.911)
  Bottom Layer w0.152: v1(100.254,122.911) 100.203,122.86 100.203,96.622 97.841,96.545 97.409,96.114 97.409,81.28 99.979,78.71 105.867,78.71 106.197,79.04 106.197,80.416 106.477,80.696 116.196,80.696 U1.162@117.2,81.7
pads on no net: H0.0 H1.0 H2.0 H3.0 U1.4 U1.5 U1.6 U1.9 U1.13 U1.18 U1.19 U1.20 U1.21 U1.38 U1.45 U1.49 U1.50 U1.51 U1.55 U1.57 U1.63 U1.64 U1.70 U1.71 U1.72 U1.73 U1.83 U1.84 U1.85 U1.93 U1.94 U1.95 U1.100 U1.101 U1.102 U1.104 U1.107 U1.108 U1.110 U1.111 U1.113 U1.118 U1.119 U1.120 U1.126 U1.127 U1.128 U1.131 U1.132 U1.133 U1.134 U1.135 U1.139 U1.142 U1.144 U1.145 U1.146 U1.147 U1.148 U1.159 U1.160 U1.161 U1.164 U1.167 U1.168 U1.169 U1.173 U1.174 U1.175 U1.177 U1.181 U1.182 U1.184 U1.187 U1.189 U1.195 U1.198 U1.199 U1.203 U1.216 U1.220 U1.222 U1.223 U1.224 U1.230 U1.233 U1.234 U1.235 U1.236 U1.237 U1.238

## Silkscreen, mask and mechanical layers (free items; w line width, h text height)
Top Overlay:
  lines w0.254: 136,73.56 136,78.2
Mechanical 1:
  lines w0.254: 78,56 198,56 ; 79,75 195,75 ; 80.7,69.4 80.7,144 ; 82,135 198,135 ; 195,69 195,144 ; 210,69 210,144
  text "TODO:" at 224,126 h1.52
  text "Copper fill" at 224,123 h1.52
  text "WARN" at 90.123,121.534 h1.52
  text "Make SMD pads longer" at 224,120.064 h1.52
  text "Remove Hole2" at 224,117.248 h1.52
  text "Arc LED strips" at 224.256,114.432 h1.52
  text "BOOST" at 90.123,113.534 h1.52
  text "OIL" at 144,113.08 h1.52
  text "VIN and GND should be adjacent and silkscreened" at 224,111.872 h1.52
  text "Remove a row of LEDs from each" at 224,109.056 h1.52
  text "75" at 216,109 h1.52
  text "Add logic level headers for 3V3 and GND." at 223.744,106.752 h1.52
  text "Pins didnt line up for LED bars" at 223.744,104.704 h1.52
  text "FPGA footprint pins mismatch" at 223.744,102.4 h1.52
  text "COOLANT" at 144,97.08 h1.52
  text "AFR" at 90.123,96.534 h1.52
  text "AFR" at 134.203,77.974 h1.52
  text "120" at 138,52 h1.52
Mechanical 4:
  lines w0.254: 194.816,144.128 80.64,144.128 78.08,141.568 ; 195,144 195,143.944 197.376,141.568 197.376,71.936 194.56,69.12 80.896,69.12 78.08,71.936 77.824,72.192 77.824,141.312 78.08,141.568 ; 78.08,141.568 78.08,141.568

## Text inside footprints (layer, text, board x,y; h text height)
U1: Bottom Overlay "SilverLining SW" at 128.917,113.766 h1.52 r90; Bottom Overlay "Intel FPGA" at 125.845,111.142 h1.52 r90; Bottom Overlay "3V3" at 101.653,126.054 h0.75 r90; Bottom Overlay "3V3" at 101.525,85.35 h0.75 r90; Bottom Overlay "GND" at 101.653,133.478 h0.75 r90; Bottom Overlay "GND" at 101.525,78.054 h0.75 r90; Bottom Overlay "BLAST IT" at 94.357,91.238 h0.75 r90; Bottom Overlay "GND" at 123.541,133.35 h0.75 r90; Bottom Overlay "5V0" at 123.541,125.926 h0.75 r90; Bottom Overlay "5V0" at 123.627,85.266 h0.75 r90; Bottom Overlay "GND" at 123.627,78.066 h0.75 r90